# Altium PCB PCB4.PcbDoc
Units mil, origin at the board's own origin, x right, y up, seen from the top; angles counter-clockwise.
Board outline 2260 x 2215 mil, 2 copper layers (Top Layer, Bottom Layer); 23 components, 13 nets, 68 pads, 45 vias.
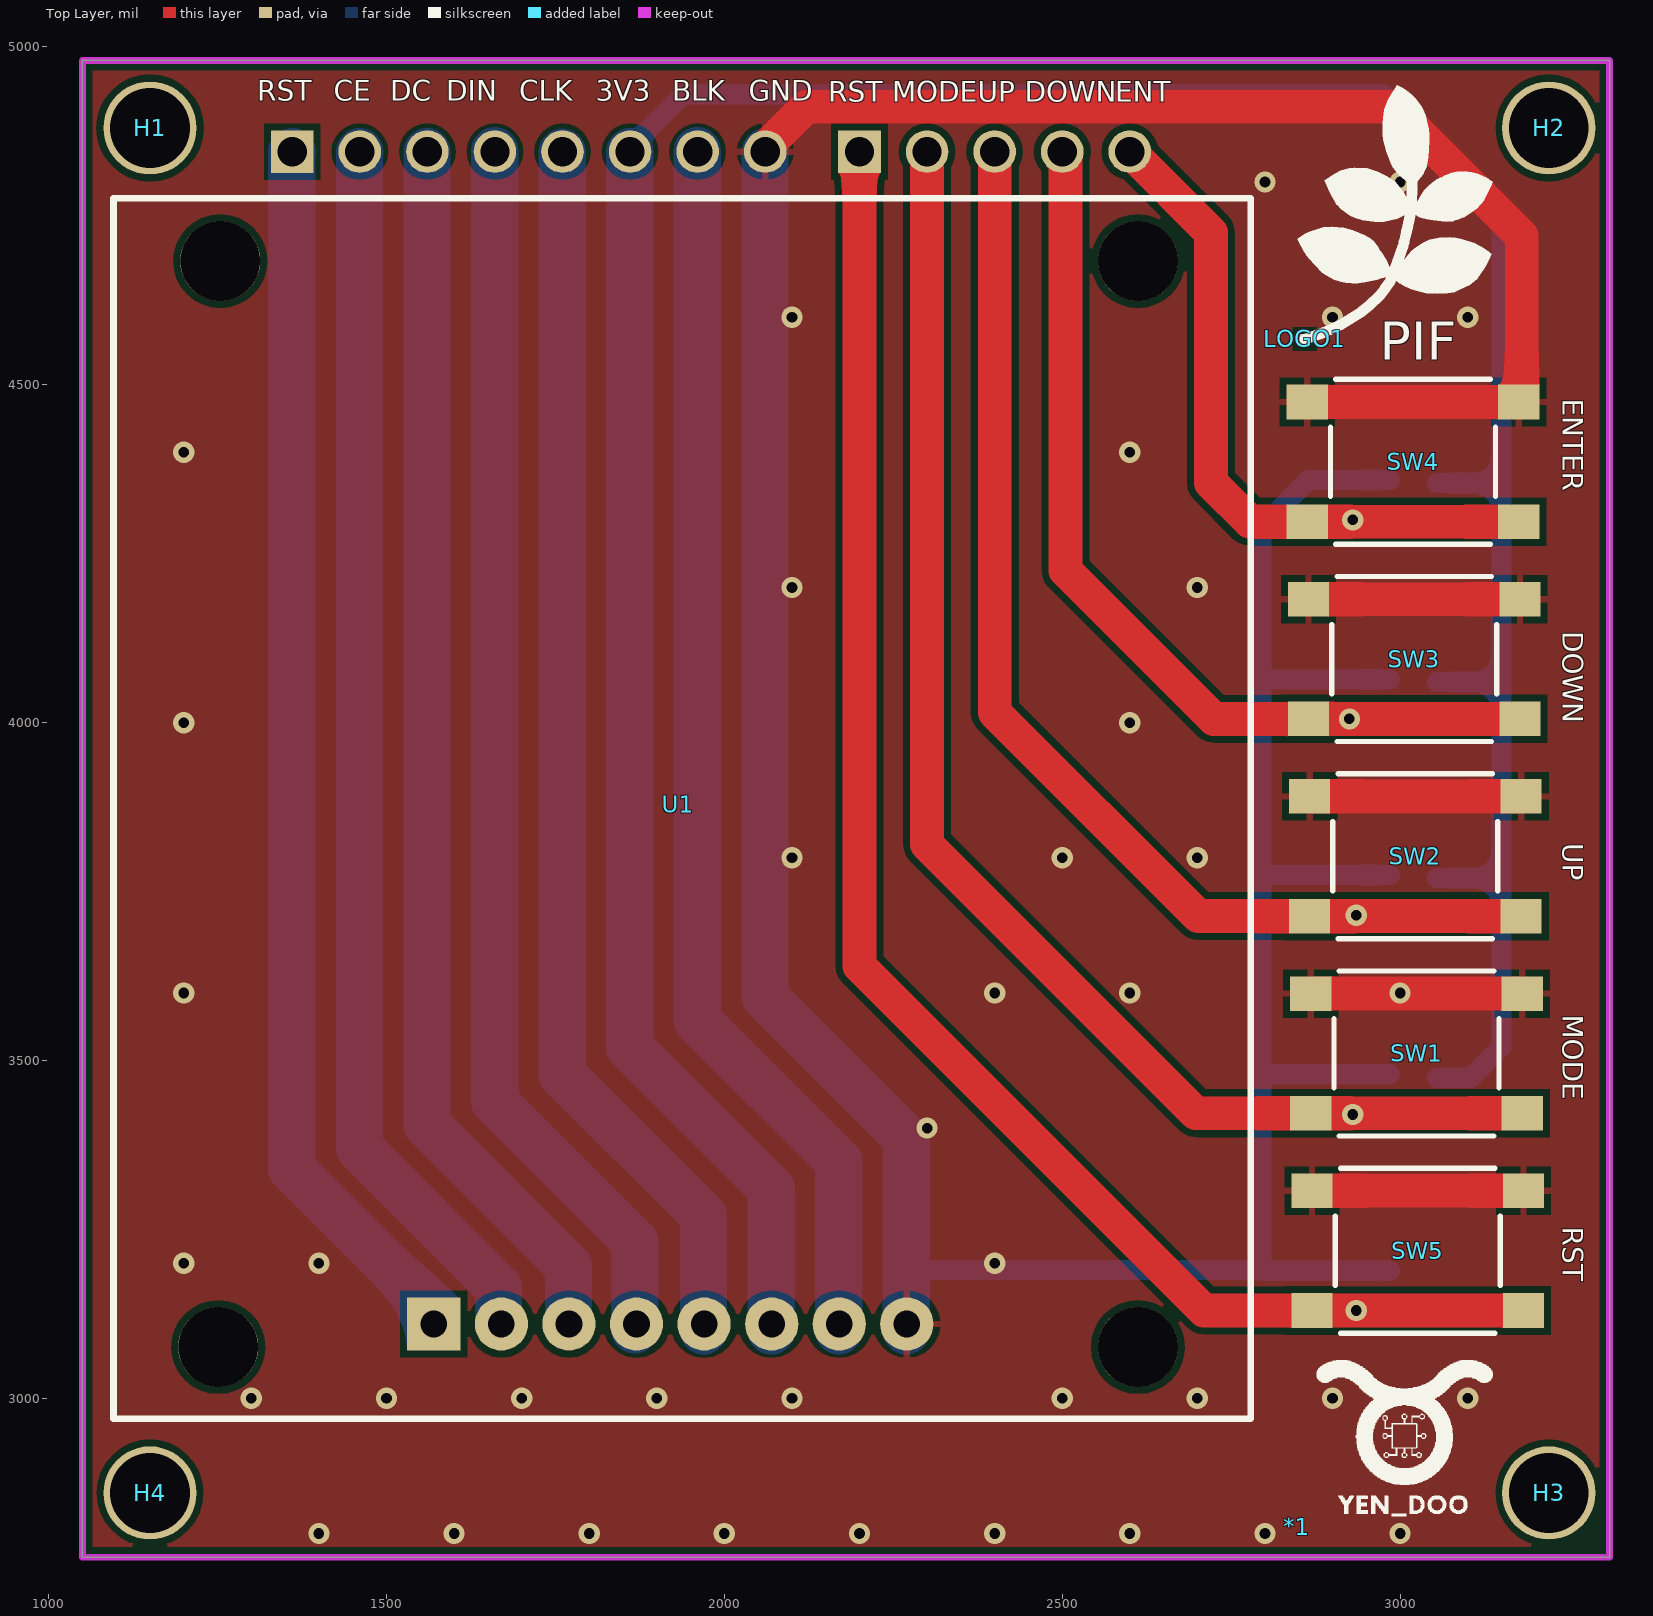
[diagram p0: Top Layer view]
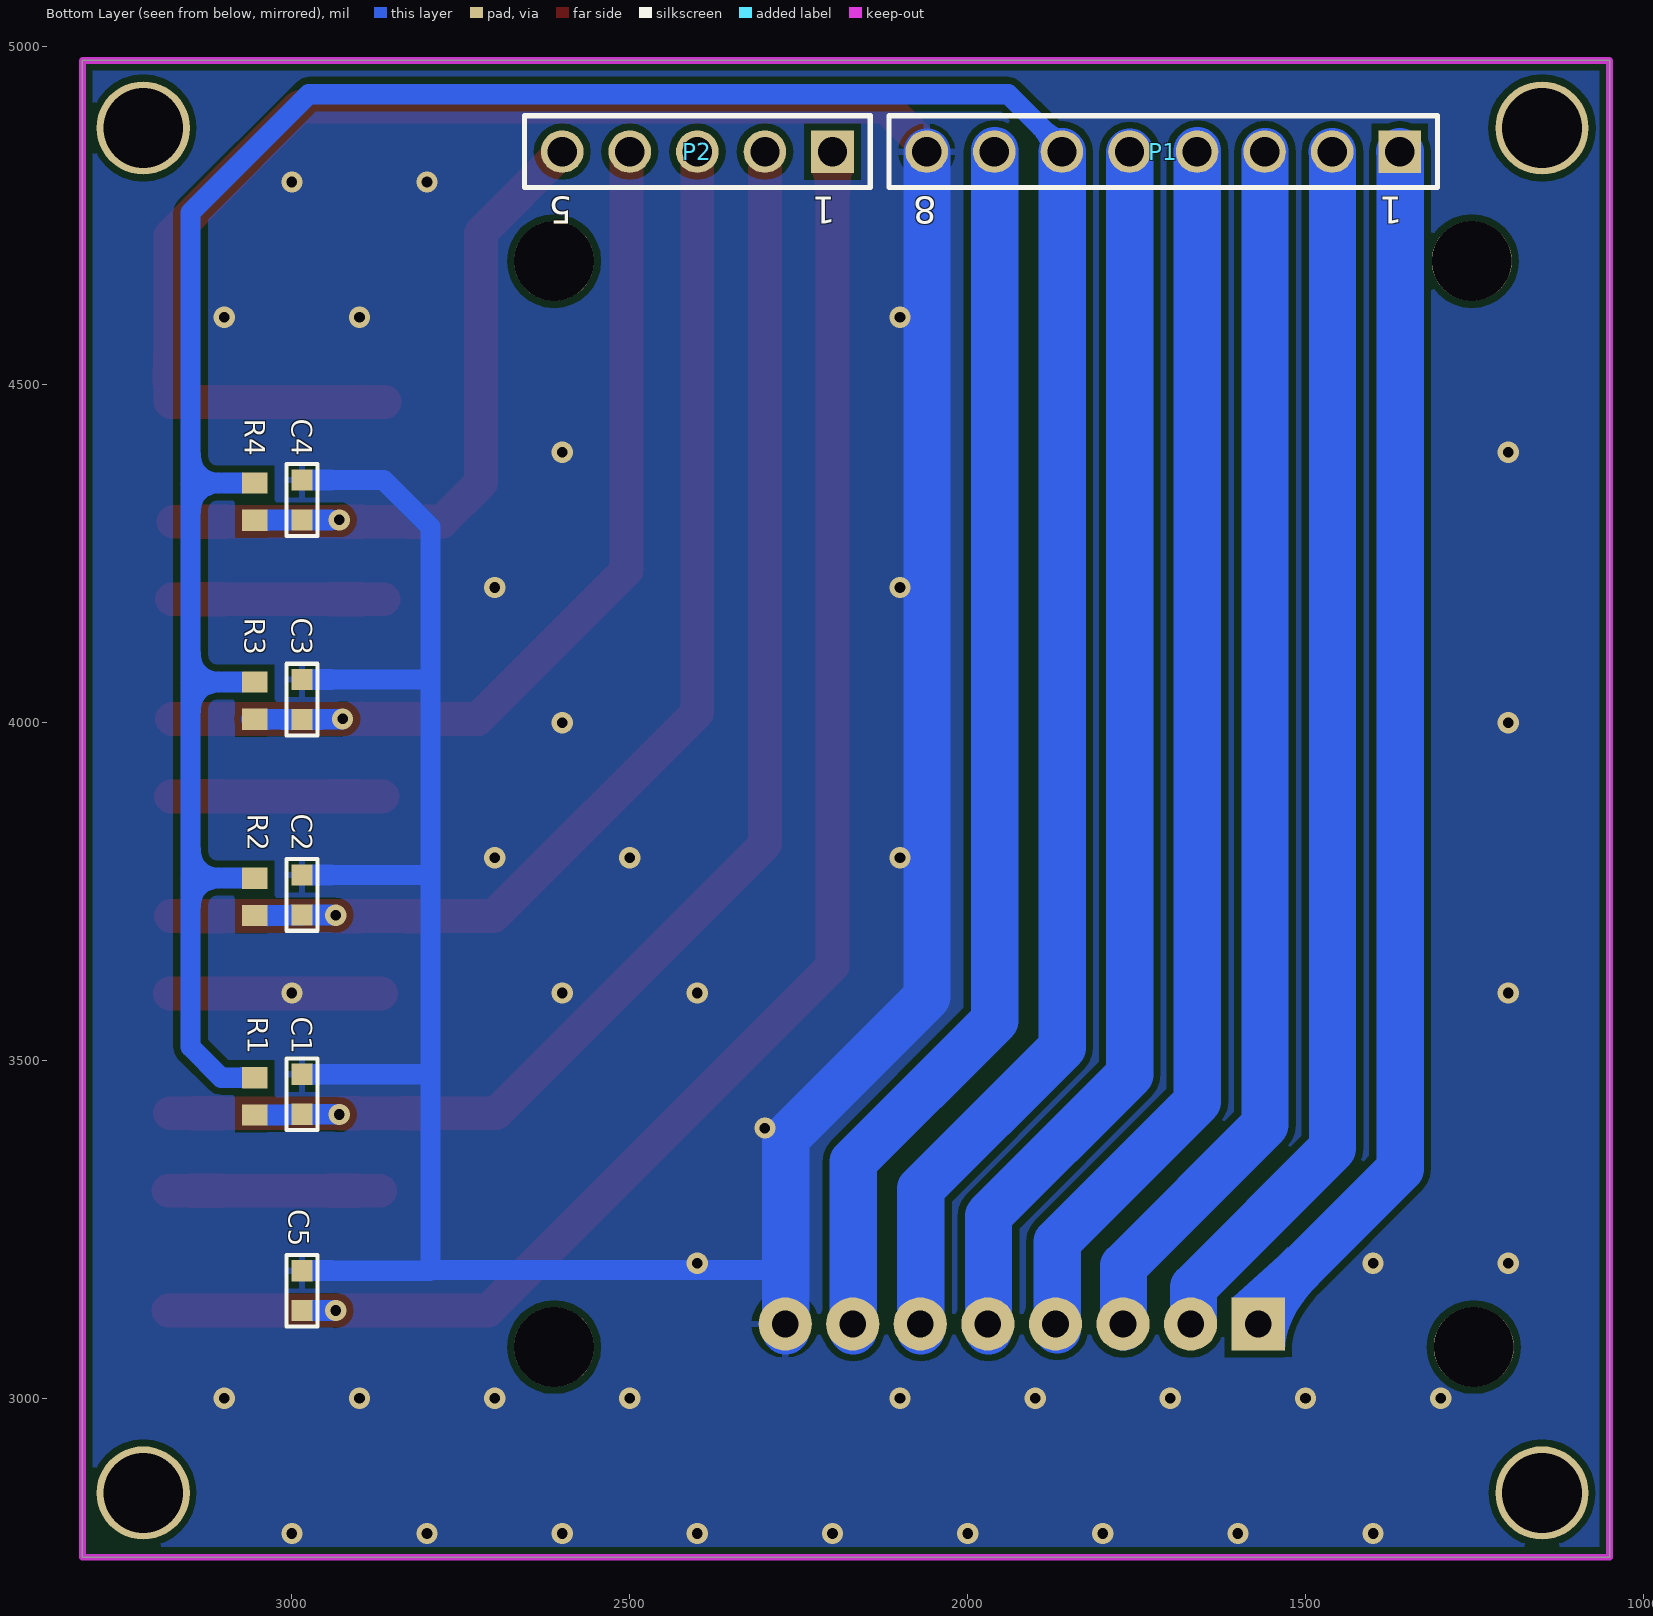
[diagram p1: Bottom Layer view, seen from below]

## Layer stack, top to bottom
Top Solder: solder mask 0.4, Solder Resist, Dk 3.5
Top Layer: signal copper 1.4
Dielectric 1: dielectric 12.6, FR-4, Dk 4.8
Bottom Layer: signal copper 1.4
Bottom Solder: solder mask 0.4, Solder Resist, Dk 3.5

## Board outline
1050,2765 1050,4980 3310,4980 3310,2765

## Design rules (kind name [scope] priority, off if disabled: settings)
Clearance [All] p1: gap=10 ignorepadtopadclearanceinfootprint=FALSE
PolygonConnect [All] p1: connectstyle=Relief reliefconductorwidth=10 reliefentries=4 polygonreliefangle="90 Angle" airgapwidth=10
RoutingVias [All] p1: holewidth=15.75 width=31.5 viastyle="Through Hole" minholewidth=15.75 minwidth=31.5 maxholewidth=15.75 maxwidth=31.5
SolderMaskExpansion [All] p1: expansion=4 istentingtop=FALSE
Width [All] p1: maxlimit=70 minlimit=30 preferedwidth=50
30 further rules are at their usual default settings.

## Classes and differential pairs
component class Sheet2: *1 C1 C5 H1 H2 H4 LOGO1 P1 P2 R1 R2 R3 R4 SW1 SW2 SW3 SW4 SW5 U1

## Components (designator, comment, footprint, x,y, rotation, side; value= is the part's Value field where it differs from the comment)
*1 "LOGO_DOO" Logo_Top_Overlay 2846.82,2810 r0 top
C1 "100nF, 10V" WCAP-CSGP_0603_H=0.8mm_Reflow 2985,3450 r270 bottom
C2 "100nF, 10V" WCAP-CSGP_0603_H=0.8mm_Reflow 2985,3745 r270 bottom
C3 "100nF, 10V" WCAP-CSGP_0603_H=0.8mm_Reflow 2985,4034.23 r270 bottom
C4 "100nF, 10V" WCAP-CSGP_0603_H=0.8mm_Reflow 2985,4329.53 r270 bottom
C5 "100nF, 10V" WCAP-CSGP_0603_H=0.8mm_Reflow 2985,3159.53 r270 bottom
H1 "Hole" "LO KHOAN 3MM" 1150,4880 r0 top
H2 "Hole" "LO KHOAN 3MM" 3220,4880 r0 top
H3 "Hole" "LO KHOAN 3MM" 3220,2860 r0 top
H4 "Hole" "LO KHOAN 3MM" 1150,2860 r0 top
LOGO1 "LOGO PIF" "PIF LOGO BIG SSTOP" 2847.89,4553.83 r0 top
P1 "61300811121" 61300811121 1710.46,4845 r0 bottom
P2 "61300511121" 61300511121 2400,4845 r0 bottom
R1 "RESISTOR SMD" RES-SM-0603 3055,3420 r90 bottom value=1K
R2 "RESISTOR SMD" RES-SM-0603 3055,3715 r90 bottom value=1K
R3 "RESISTOR SMD" RES-SM-0603 3055,4005.44 r90 bottom value=1K
R4 "RESISTOR SMD" RES-SM-0603 3055,4300 r90 bottom value=1K
SW1 "430152043836" WS-TASV_L6W6H4.3_4301x20438x6 3024.35,3510.45 r0 top
SW2 "430152043836" WS-TASV_L6W6H4.3_4301x20438x6 3022.61,3802.27 r0 top
SW3 "430152043836" WS-TASV_L6W6H4.3_4301x20438x6 3020.87,4094.09 r0 top
SW4 "430152043836" WS-TASV_L6W6H4.3_4301x20438x6 3019.12,4385.92 r0 top
SW5 "430152043836" WS-TASV_L6W6H4.3_4301x20438x6 3026.09,3218.63 r0 top
U1 "LCD Nokia 5110" LCD5110 1570,3110 r0 top

## Footprints (in the part's own frame and the unit in brackets; to place one, negate y for a bottom-side part, rotate by r counter-clockwise, add the part's x,y. Pads: shape width x height; smd on the part's side, far side on the other; paste and mask are expansions set on the pad)
61300511121 [mm] "Pin Header, pitch 2.54 mm, THT, Vertical, single row, 5p"
  rect 1.6x1.6 hole 1.1: 1(-5.08,0)
  round 1.6 hole 1.1: 2(-2.54,0) 3(0,0) 4(2.54,0) 5(5.08,0)
  silkscreen extent -6.5,-1.35 6.5,1.35, body extent -6.35,-1.27 6.35,1.27, height 8.57
61300811121 [mm] "Pin Header, pitch 2.54 mm, THT, Vertical, single row, 8p"
  rect 1.6x1.6 hole 1.1: 1(-8.89,0)
  round 1.6 hole 1.1: 2(-6.35,0) 3(-3.81,0) 4(-1.27,0) 5(1.27,0) 6(3.81,0) 7(6.35,0) 8(8.89,0)
  silkscreen extent -10.31,-1.35 10.31,1.35, body extent -10.16,-1.27 10.16,1.27, height 8.57
LCD5110 [mm]
  rect 2x2 hole 1: 1(0,0)
  round 2 hole 1: 2(2.54,0) 3(5.08,0) 4(7.62,0) 5(10.16,0) 6(12.7,0) 7(15.24,0) 8(17.78,0)
  round 3 hole 3: 26(-8.103,-0.864) 26(-8.026,39.954) 26(26.467,-0.864) 26(26.467,39.954)
  silkscreen extent -12.04,-3.56 30.71,42.32, body extent -11.98,-3.65 30.72,42.76, height 16.5
"LO KHOAN 3MM" [mil]
  round 138 hole 118.1: 1(0,0)
Logo_Top_Overlay [mil]
  silkscreen extent 30,16 290,246
"PIF LOGO BIG SSTOP" [mil]
  rect 15x15 smd: 1(11,14)
  silkscreen extent 0,14 289,389
RES-SM-0603 [mm]
  rect 0.8x0.95 smd: 1(-0.014,0) 2(1.386,0)
  body extent -0.11,-0.4 1.49,0.4, height 0.3
WCAP-CSGP_0603_H=0.8mm_Reflow [mm] "Ceramic Capacitors, body 1.6x0.8mm"
  rect 0.8x0.8 smd: 1(-0.75,0) 2(0.75,0)
  silkscreen extent -1.34,-0.58 1.35,0.58, body extent -0.8,-0.4 0.8,0.4, height 0.8
WS-TASV_L6W6H4.3_4301x20438x6 [mm] "SMD Tact Switch, body 6x6mm"
  rect 1.55x1.3 smd: A1(-3.975,2.25) A2(3.975,2.25) B1(-3.975,-2.25) B2(3.975,-2.25)
  silkscreen extent -3.1,-3.1 3.1,3.1, body extent -4.5,-3.1 4.5,3.1, height 4.3

## Part data
C1 C2 C3 C4 C5: library part 885012206020, "WCAP-CSGP Multilayer Ceramic Chip Capacitor, General Purpose, size 0603, X7R, 100nF, 10V", Capacitance=100nF, Capacitance Tolerance=+/-10%, Isolation Resistance=>=5GOhm, Manufacturer="Wurth Elektronik", Operating Temperature="-55 to +125degC", Rated Voltage=10VDC, Ceramic Type=X7R, ComponentLink1Description=Manufacturer, ComponentLink1URL=http://www.we-online.de, ComponentLink2Description=Datasheet, ComponentLink2URL=https://www.we-online.com/catalog/datasheet/885012206020.pdf, Dissipation Factor=#NAME?, Height=0.8mm, Manufacturer Part Number=885012206020, Mounting Technology=SMT, Packaging="Tape and Reel", Published Date="May 2020", Size=0603, Technical Reference=X7R0603104K010DFCT10000
H1 H2 H3 H4: "Hole 3mm"
P1: "WR-PHD Pin Header, THT, pitch 2.54mm, Single Row, Vertical, 8p", Contact Resistance=20mOhm, Manufacturer="Wurth Elektronik", Operating Temperature="-40 to +105degC", Rated Current=3A, Withstanding Voltage=500VAC, Working Voltage=250VAC, ComponentLink1Description=Manufacturer, ComponentLink1URL=http://www.we-online.de, ComponentLink2Description=Datasheet, ComponentLink2URL=https://www.we-online.com/catalog/datasheet/61300811121.pdf, Gender="Pin Header", Manufacturer Part Number=61300811121, Mounting Technology=THT, Orientation=Vertical, Packaging=Bag, Pin Number=8, Pitch=2.54mm, Published Date="May 2020", Row Number=Single
P2: "WR-PHD Pin Header, THT, pitch 2.54mm, Single Row, Vertical, 5p", Contact Resistance=20mOhm, Manufacturer="Wurth Elektronik", Operating Temperature="-40 to +105degC", Rated Current=3A, Withstanding Voltage=500VAC, Working Voltage=250VAC, ComponentLink1Description=Manufacturer, ComponentLink1URL=http://www.we-online.de, ComponentLink2Description=Datasheet, ComponentLink2URL=https://www.we-online.com/catalog/datasheet/61300511121.pdf, Gender="Pin Header", Manufacturer Part Number=61300511121, Mounting Technology=THT, Orientation=Vertical, Packaging=Bag, Pin Number=5, Pitch=2.54mm, Published Date="May 2020", Row Number=Single
R1 R2 R3 R4: "Resistor"
SW1 SW2 SW3 SW4 SW5: "WS-TASV SMT Tact Switch, 12VDC, 50mA, 360g, height 4.3mm", Actuator Color=Salmon, Manufacturer="Wurth Elektronik", Operating Temperature max.=85C, Operating Temperature min.=-40C, Rated Current=50mA, Rated Voltage=12V, ComponentLink1Description="Manufacturer Link", ComponentLink1URL=http://www.we-online.de, ComponentLink2Description=Datasheet, ComponentLink2URL=https://www.we-online.com/catalog/datasheet/430152043836.pdf, Contact Material="Stainless Steel", Contact Plating=Silver, Electrical Life=200000Cycles, Height=4.3mm, Length=6mm, Manufacturer Part Number=430152043836, Mounting Technology=SMT, Operation Force=360g, Packaging="Tape and Reel", Terminal Material="Copper Alloy", Terminal Plating=Silver, Washable=No, Width=6mm
U1: library part LCD_Nokia_5110

## Via types
v1: diameter 31.5/31.5 (per signal layer), hole 15.75, Top Layer to Bottom Layer, tented both sides, 40 vias
v2: diameter 31.5, hole 15.75, Top Layer to Bottom Layer, tented both sides, 5 vias

## Nets (pads, with @x,y where several pads share a name; then routed paths per layer and width w, separated by ;. In a path a pad name is that pad's centre, name@x,y a point inside that pad or via, vN(x,y) a via of type N, cw(c..) or ccw(c..) an arc to the next point about the centre after c; other vN are vias at no path point)
3V3: P1.6 R1.2 R2.2 R3.2 R4.2 U1.6 | length 4866.3
  Bottom Layer w30: P1.6 1860.46,4850.46 1940,4930 2975,4930 3150,4755 3150,4354.56 ; R1.2 3104.56,3474.56 3150,3520 3150,3770 ; R2.2 3055.44,3770 3150,3770 ; R3.2 3150,4060 ; R4.2 3150,4354.56 ; 3150,3770 3150,4060 ; 3150,4060 3150,4354.56
  Bottom Layer w70: P1.6 1860,4844.54 1860,3519.25 2069.25,3310 U1.6@2069.25,3100
GND: C1.1 C2.1 C3.1 C4.1 C5.1 P1.8 SW1.A1 SW1.A2 SW2.A1 SW2.A2 SW3.A1 SW3.A2 SW4.A1 SW4.A2 SW5.A1 SW5.A2 U1.8 | length 7558.7
  Top Layer w50: P1.8@2059.43,4847.49 2066.96,4855.01 2066.96,4856.93 2121.52,4911.5 2988.5,4911.5 3180,4720 3180,4475.09 3179.41,4474.5 SW4.A2 SW4.A1 ; SW3.A1 SW3.A2 ; SW2.A1 SW2.A2 ; SW1.A1 SW1.A2 ; SW5.A1 SW5.A2
  Bottom Layer w30: U1.8 2270,3190 2795,3190 ; C5.1 2795.94,3189.06 2795,3190 ; C1.1 2795.47,3479.53 2795,3480 ; C2.1 2795.47,3774.53 2795,3775 ; C3.1 2798.76,4063.76 2795,4060 ; C4.1 2864.06,4359.06 2795,4290 2795,4060 ; 2795,3190 2795,3480 ; 2795,3480 2795,3775 ; 2795,3775 2795,4060
  Bottom Layer w70: P1.8@2060,4844.07 2060,3594.25 2269.25,3385 2269.25,3190 U1.8@2269.25,3100
  other v1: 1400,2800 1600,2800 1800,2800 2000,2800 2200,2800 2400,2800 2600,2800 2800,2800 3000,2800 1300,3000 1500,3000 1700,3000 1900,3000 2100,3000 2500,3000 2700,3000 2900,3000 3100,3000 1200,3200 1400,3200 2400,3200 2300,3400 1200,3600 2400,3600 2600,3600 3000,3600 2100,3800 2500,3800 2700,3800 1200,4000 2600,4000 2100,4200 2700,4200 1200,4400 2600,4400 2100,4600 2900,4600 3100,4600 2800,4800 3000,4800
NetC1_2: C1.2 P2.2 R1.1 SW1.B1 SW1.B2 | length 2190.4
  Top Layer w50: P2.2@2300,4839 2300,3820 2698.13,3421.87 SW1.B1 2930,3421.87 SW1.B2
  Bottom Layer w30: v2(2930,3420) 2930.47,3420.47 C1.2 2986.03,3419.44 R1.1
NetC2_2: C2.2 P2.3 R2.1 SW2.B1 SW2.B2 | length 1853.9
  Top Layer w50: P2.3@2400,4844.36 2400,4015 2701.31,3713.69 SW2.B1 2935,3713.69 SW2.B2
  Bottom Layer w30: v2(2935,3715) 2935.47,3715.47 C2.2 2986.03,3714.44 R2.1
NetC3_2: C3.2 P2.4 R3.1 SW3.B1 SW3.B2 | length 1524.5
  Top Layer w50: P2.4@2504.38,4849.11 2502.49,4847.21 2502.49,4833.33 2505,4830.81 2505,4225 2724.49,4005.51 SW3.B1 v2(2925,4005.51) SW3.B2
  Bottom Layer w30: v2(2925,4005.51) 2925.4,4005.51 2926.03,4004.88 R3.1 R3.1@3060,4004.88
NetC4_2: C4.2 P2.5 R4.1 SW4.B1 SW4.B2 | length 1144.4
  Top Layer w50: P2.5 2720,4725 2720,4355 2777.67,4297.33 2930,4297.33 SW4.B2
  Bottom Layer w30: v2(2930,4300) C4.2 2985.28,4299.72 3054.72,4299.72 R4.1
NetC5_2: C5.2 P2.1 SW5.B1 SW5.B2 | length 2442.3
  Top Layer w50: P2.1@2200,4838.5 2200,3640 2709.95,3130.05 SW5.B1 v2(2935,3130) SW5.B2
  Bottom Layer w30: v2(2935,3130) C5.2
NetP1_1: P1.1 U1.1 | length 1822.2
  Bottom Layer w70: P1.1 1360,4844.54 1360,3340 1565.63,3134.37 1565.63,3114.37 U1.1
NetP1_2: P1.2 U1.2 | length 1817.4
  Bottom Layer w70: P1.2 1460,4844.54 1460,3370 1665.63,3164.37 1665.63,3116.74 U1.2@1668.33,3114.04
NetP1_3: P1.3 U1.3 | length 1825.8
  Bottom Layer w70: P1.3@1560,4845.12 1560,3405 1769.25,3195.75 U1.3@1769.25,3105.96
NetP1_4: P1.4 U1.4 | length 1830.5
  Bottom Layer w70: P1.4@1660,4846.21 1660,3439.25 1867.58,3231.67 U1.4@1867.58,3101.67
NetP1_5: P1.5 U1.5 | length 1830.6
  Bottom Layer w70: P1.5@1760,4843.92 1760,3479.25 1969.25,3270 U1.5@1969.25,3100
NetP1_7: P1.7 U1.7 | length 1832.9
  Bottom Layer w70: P1.7@1960,4846.2 1960,3559.25 2169.25,3350 U1.7@2169.25,3100
pads on no net: H1.1 H2.1 H3.1 H4.1 LOGO1.1 U1.26

## Polygon pours and split planes (outlines as drawn)
GND on Top Layer "GND_L01_P000" (solid, remove dead copper, pour order 0): 1050,2765 1050,4980 3310,4980 3310,2765
GND on Bottom Layer "GND_L02_P001" (solid, remove dead copper, pour order 1): 1050,2765 1050,4980 3310,4980 3310,2765

## Keep-outs
Keep-Out Layer:
  the board outline again, w10

## Silkscreen, mask and mechanical layers (free items; w line width, h text height)
Top Overlay:
  text "RST" at 1309,4920 h30
  text "CE" at 1422.14,4920 h30
  text "DC" at 1505.29,4920 h30
  text "DIN" at 1588.44,4920 h30
  text "CLK" at 1696.58,4920 h30
  text "3V3" at 1809.72,4920 h30
  text "BLK" at 1922.86,4920 h30
  text "GND" at 2036,4920 h30
  text "RST" at 2153.64,4919.07 h30
  text "MODE" at 2248.64,4919.07 h30
  text "UP" at 2374.64,4919.07 h30
  text "DOWN" at 2444.64,4919.07 h30
  text "ENT" at 2578.64,4919.07 h30
  text "ENTER" at 3241,4479 h30 r270
  text "DOWN" at 3241,4135.26 h30 r270
  text "UP" at 3241,3821.51 h30 r270
  text "MODE" at 3241,3567.75 h30 r270
  text "RST" at 3241,3254 h30 r270

## Text inside footprints (layer, text, board x,y; h text height)
LOGO1: Top Overlay "PIF" at 2969.56,4536.83 h56.25
P1: Bottom Overlay "8" at 2045.5,4778.07 h40 r180; Bottom Overlay "1" at 1355.74,4778.07 h40 r180
P2: Bottom Overlay "5" at 2585.04,4778.07 h40 r180; Bottom Overlay "1" at 2195.28,4778.07 h40 r180